# Altium PCB ntcsensor.PcbDoc
Units mil, origin at the board's own origin, x right, y up, seen from the top; angles counter-clockwise.
Board outline 944.88 x 1023.62 mil, 2 copper layers (Top Layer, Bottom Layer); 23 components, 17 nets, 85 pads, 58 vias.
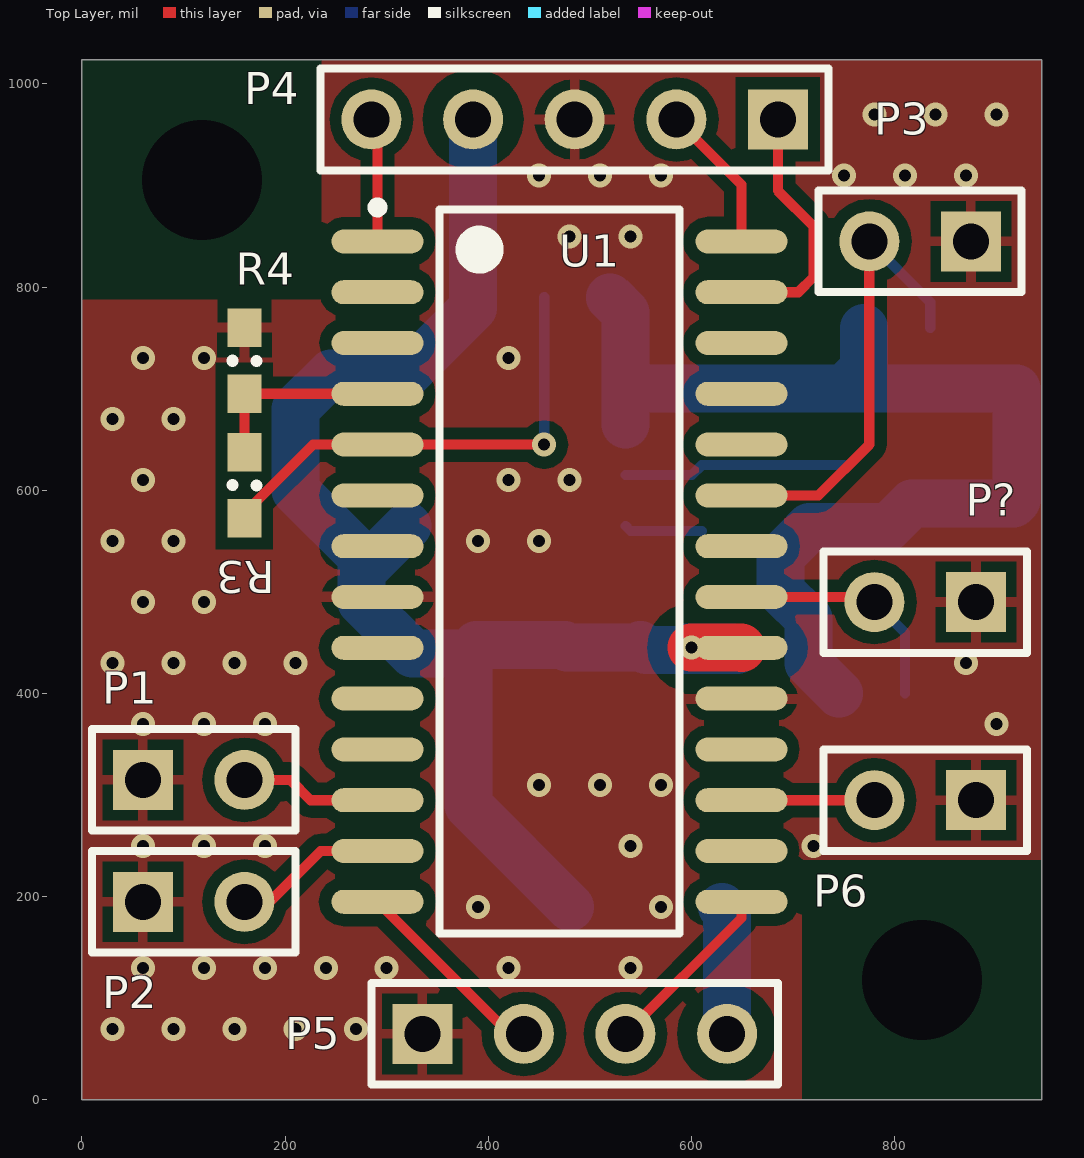
[diagram p0: Top Layer view]
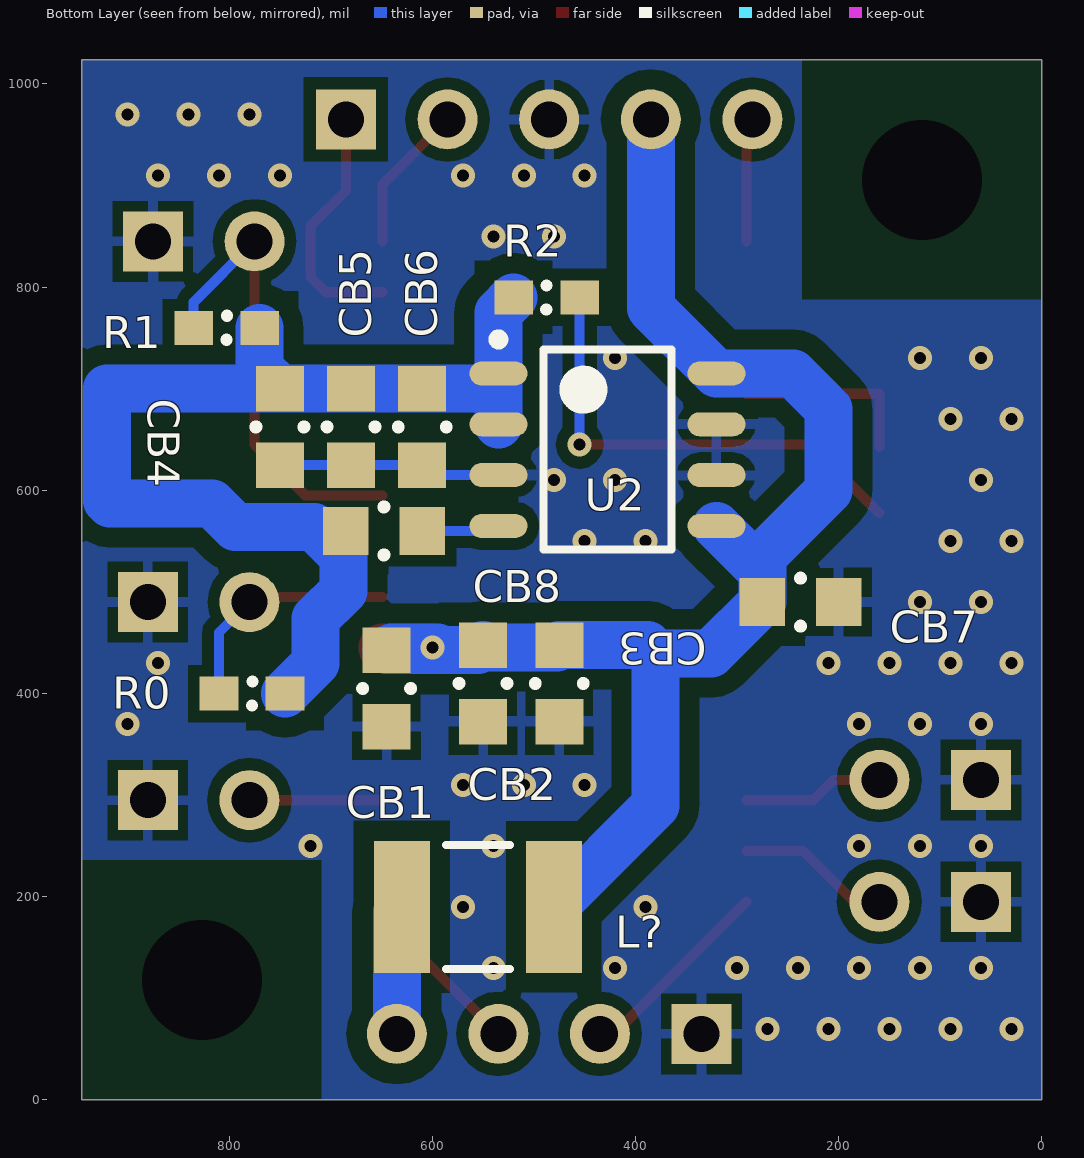
[diagram p1: Bottom Layer view, seen from below]

## Layer stack, top to bottom
Top Solder: solder mask 0.4, Solder Resist, Dk 3.5
Top Layer: signal copper 1.4
Dielectric 1: dielectric 12.6, FR-4, Dk 4.8
Bottom Layer: signal copper 1.4
Bottom Solder: solder mask 0.4, Solder Resist, Dk 3.5

## Board outline
0,0 0,1023.62 944.88,1023.62 944.88,0

## Design rules (kind name [scope] priority, off if disabled: settings)
Clearance Clearance_5 [HasFootprint('BALF-NRG') vs InPolygonClass('All Polygons')] p1: gap=19.68 ignorepadtopadclearanceinfootprint=FALSE
Clearance Clearance_6 [InNet('NetA1_ANT') vs InPolygonClass('All Polygons')] p2: gap=11.81 ignorepadtopadclearanceinfootprint=FALSE
Clearance Clearance_7 [InNetClass('HC') vs InPolygonClass('All Polygons')] p3: gap=19.68 ignorepadtopadclearanceinfootprint=FALSE
Clearance Clearance_9 [All vs InPolygonClass('All Polygons')] p4: gap=11.81 ignorepadtopadclearanceinfootprint=FALSE
Clearance Clearance_1 [InNet('NetA1_ANT')] p5: gap=3.94 ignorepadtopadclearanceinfootprint=FALSE
Clearance [InNetClass('RFB')] p6: gap=3.94 ignorepadtopadclearanceinfootprint=FALSE
Clearance Clearance_4 [HasFootprint('BALF-NRG')] p7: gap=7.87 ignorepadtopadclearanceinfootprint=FALSE
Clearance Clearance_3 [HasFootprint('MSOP-8')] p8: gap=7.87 ignorepadtopadclearanceinfootprint=FALSE
Clearance Clearance_2 [HasFootprint('BLUENRG-1')] p9: gap=5.91 ignorepadtopadclearanceinfootprint=FALSE
Clearance Clearance_8 [All] p10: gap=7.87 ignorepadtopadclearanceinfootprint=FALSE
HoleSize [All] p1: absolutevalues=TRUE maxlimit=1000 minlimit=1 maxpercent=80.000 minpercent=20.000
MaxMinImpedance [InNetClass('AN')] p1: minimum=45.00 maximum=55.00
MinimumSolderMaskSliver MinimumSolderMaskSliver_2 [HasFootprint('BALF-NRG')] p1: minsoldermaskwidth=0.79
MinimumSolderMaskSliver [HasFootprint('16MHZ_25_20')] p2: minsoldermaskwidth=4.72
MinimumSolderMaskSliver MinimumSolderMaskSliver_1 [All] p3: minsoldermaskwidth=7.87
PlaneClearance [All] p1: clearance=40
PolygonConnect PolygonConnect_1 [HasFootprint('BlueNRG-1')] p1: connectstyle=Direct reliefconductorwidth=10 reliefentries=4 polygonreliefangle="90 Angle" airgapwidth=10
PolygonConnect PolygonConnect_4 [HasFootprint('sma')] p2: connectstyle=Direct reliefconductorwidth=10 reliefentries=4 polygonreliefangle="90 Angle" airgapwidth=10
PolygonConnect PolygonConnect_3 [IsShieldingVia] p3: connectstyle=Direct reliefconductorwidth=10 reliefentries=4 polygonreliefangle="90 Angle" airgapwidth=10
PolygonConnect PolygonConnect_2 [IsStitchingVia] p4: connectstyle=Direct reliefconductorwidth=10 reliefentries=4 polygonreliefangle="90 Angle" airgapwidth=10
PolygonConnect [All] p5: connectstyle=Relief reliefconductorwidth=10 reliefentries=4 polygonreliefangle="90 Angle" airgapwidth=10
RoutingCorners [InNetClass('AN')] p1: cornerstyle=Round minsetback=100 maxsetback=100
RoutingCorners RoutingCorners_1 [All] p2: cornerstyle=45-Degree minsetback=100 maxsetback=100
RoutingVias [All] p1: holewidth=11.81 width=23.62 viastyle="Through Hole" minholewidth=11.81 minwidth=23.62 maxholewidth=11.81 maxwidth=23.62
SMDNeckDown [InNet('NetA1_ANT')] p1: percent=600.000
SignalStimulus [All] p1: kind=1 level=0 starttime=10.00n stoptime=60.00n periodtime=100.00n
SilkToSolderMaskClearance SilkToSolderMaskClearance_1 [HasFootprint('MY_0603')] p1: minsilkscreentomaskgap=2 clearancetoexposedcopper=TRUE
SilkToSolderMaskClearance SilkToSolderMaskClearance_2 [HasFootprint('MY_0805')] p2: minsilkscreentomaskgap=3.94 clearancetoexposedcopper=TRUE
SilkToSolderMaskClearance [IsPad] p3: minsilkscreentomaskgap=10 clearancetoexposedcopper=TRUE
SolderMaskExpansion [All] p1: expansion=4
SupplyNets SupplyNets_1 [InNet('VCC')] p1: voltage=3.000
SupplyNets [InNet('12V')] p2: voltage=12.00
Width [InNet('NetA1_ANT')] p1: maxlimit=67.17 minlimit=-1.73 preferedwidth=48.94 toplayer_minwidth=1.46 bottomlayer_maxwidth=-1.65 bottomlayer_prefwidth=-1.69 impedancedriven=TRUE minimp=40.000000 maximp=140.000000 favimp=50.000000
Width Width_2 [InNetClass('HC')] p2: maxlimit=47.24 minlimit=5.91 preferedwidth=47.24
Width Width_1 [All] p3: maxlimit=31.5 minlimit=5.91 preferedwidth=10
25 further rules are at their usual default settings.

## Classes and differential pairs
net class HC: 3V3 5V NetL?_1

## Components (designator, comment, footprint, x,y, rotation, side; value= is the part's Value field where it differs from the comment)
CB1 "10uF" MY_0805 645,405 r90 bottom value=100pF
CB2 "1nF" MY_0805 550,410 r90 bottom value=100pF
CB3 "100pF" MY_0805 475,410 r90 bottom
CB4 "10uF" MY_0805 750,662.4 r90 bottom value=100pF
CB5 "1nF" MY_0805 680,662.4 r90 bottom value=100pF
CB6 "100pF" MY_0805 610,662.4 r90 bottom
CB7 "1uF" MY_0805 237.6,490 r0 bottom value=100pF
CB8 "10nF" MY_0805 647.6,560 r0 bottom value=100pF
L? "Inductor" INDC4532 555.2,190 r180 bottom value=10uH
P1 "Header 2" HDR1X2 60,315 r0 top
P2 "Header 2" HDR1X2 60,195 r0 top
P3 "Header 2" HDR1X2 875,845 r180 top
P4 "Header 5" HDR1X5 685,965 r180 top
P5 "Header 4" HDR1X4 335,65 r0 top
P6 "Header 2" HDR1X2 880,295 r180 top
P? "Header 2" HDR1X2 880,490 r180 top
R0 "4.7k" MY_0603 777.52,400 r180 bottom value=1K
R1 "4.7k" MY_0603 802.48,760 r180 bottom value=1K
R2 "4.7k" MY_0603 487.52,790 r0 bottom value=1K
R3 "4.7k" MY_0603 160,605 r270 top value=1K
R4 "4.7k" MY_0603 160,727.52 r270 top value=1K
U1 "PIC16F1938-I/SN" SOIC-SO28_N 470,520 r0 top
U2 "LT17633" SOP8LDO 427.72,640 r180 bottom

## Footprints (in the part's own frame and the unit in brackets; to place one, negate y for a bottom-side part, rotate by r counter-clockwise, add the part's x,y. Pads: shape width x height; smd on the part's side, far side on the other; paste and mask are expansions set on the pad)
HDR1X2 [mm] "Connector; Header; 2 Position"
  rect 1.5x1.5 hole 0.9: 1(0,0)
  round 1.5 hole 0.9: 2(2.54,0)
  silkscreen extent -1.27,-1.27 3.81,1.27
HDR1X4 [mm] "Connector; Header; 4 Position"
  rect 1.5x1.5 hole 0.9: 1(0,0)
  round 1.5 hole 0.9: 2(2.54,0) 3(5.08,0) 4(7.62,0)
  silkscreen extent -1.27,-1.27 8.89,1.27
HDR1X5 [mm] "Connector; Header; 5 Position"
  rect 1.5x1.5 hole 0.9: 1(0,0)
  round 1.5 hole 0.9: 2(2.54,0) 3(5.08,0) 4(7.62,0) 5(10.16,0)
  silkscreen extent -1.27,-1.27 11.43,1.27
INDC4532 [mm] "Chip Inductor, Body 4.5x3.2mm, IPC High Density"
  rect 1.4x3.3 smd: 1(-1.9,0) 2(1.9,0)
  silkscreen extent -0.8,-1.55 0.8,1.55, body extent -2.4,-1.7 2.4,1.7, height 0.55
MY_0603 [mm] "0603 without silkscreen issues"
  rect 0.965x0.85 smd: 1(-0.825,0) 2(0.825,0)
  silkscreen extent 0,-0.3 0.01,0.31, body extent -0.8,-0.4 0.8,0.4, height 3
MY_0805 [mm] "0805 without silkscreen issues"
  rect 1.14x1.2 smd: 1(-0.955,0) 2(0.955,0)
  silkscreen extent -0.01,-0.61 0.01,0.61, body extent -1,-0.6 1,0.6, height 4
SOIC-SO28_N [mm] "SOIC, 28-Leads, Body 17.9x7.5mm, Pitch 1.27mm, IPC Medium Density"
  oval 2.3x0.6 smd: 1(-4.55,8.255) 2(-4.55,6.985) 3(-4.55,5.715) 4(-4.55,4.445) 5(-4.55,3.175) 6(-4.55,1.905) 7(-4.55,0.635) 8(-4.55,-0.635) 9(-4.55,-1.905) 10(-4.55,-3.175) 11(-4.55,-4.445) 12(-4.55,-5.715) 13(-4.55,-6.985) 14(-4.55,-8.255) 15(4.55,-8.255) 16(4.55,-6.985) 17(4.55,-5.715) 18(4.55,-4.445) 19(4.55,-3.175) 20(4.55,-1.905) 21(4.55,-0.635) 22(4.55,0.635) 23(4.55,1.905) 24(4.55,3.175) 25(4.55,4.445) 26(4.55,5.715) 27(4.55,6.985) 28(4.55,8.255)
  silkscreen extent -4.67,-9.05 3,9.23, body extent -3.8,-9.06 3.8,9.06, height 2.65
SOP8LDO [mm] "SOP, 8-Leads, Body 4.90x3.90mm, Pitch 1.27mm, IPC Medium Density"
  oval 1.45x0.6 smd: 1(-2.725,1.905) 2(-2.725,0.635) 3(-2.725,-0.635) 4(-2.725,-1.905) 5(2.725,-1.905) 6(2.725,-0.635) 7(2.725,0.635) 8(2.725,1.905)
  silkscreen extent -2.85,-2.5 1.6,2.88, body extent -2,-2.5 2,2.5, height 2.65

## Part data
CB1 CB2 CB3 CB4 CB5 CB6 CB7 CB8: library part "Cap Semi", "Capacitor (Semiconductor SIM Model)", LatestRevisionDate=29-May-2009, LatestRevisionNote="IPC-7351 Footprint Added.", PackageDescription="Chip Capacitor", PackageReference=C1206, Published=8-Jun-2000, Publisher="Altium Limited"
P1 P2 P3 P6 P?: "Header, 2-Pin", LatestRevisionDate=17-Jul-2002, LatestRevisionNote="Re-released for DXP Platform.", Publisher="Altium Limited"
P4: "Header, 5-Pin", LatestRevisionDate=17-Jul-2002, LatestRevisionNote="Re-released for DXP Platform.", Publisher="Altium Limited"
P5: "Header, 4-Pin", LatestRevisionDate=17-Jul-2002, LatestRevisionNote="Re-released for DXP Platform.", Publisher="Altium Limited"
R0 R1 R2 R3 R4: library part Res3, "Resistor", LatestRevisionDate=29-May-2009, LatestRevisionNote="IPC-7351 Footprint Added.", PackageDescription="Chip Resistor", PackageReference=J1-0603, Published=8-Jun-2000, Publisher="Altium Limited"
U1: library part PIC16F1936-I/SO, "CMOS Microcontroller with LCD Driver, 8K (words) Program Memory, 256 Bytes Data Memory, 512 Bytes SRAM, 25 I/O's, 28-Pin SOIC, Industrial Temperature", Supplier Part Number 1=PIC16F1936-I/SO-ND, Code_JEDEC=MS-013, ComponentLink1Description=Datasheet, ComponentLink1URL=http://ww1.microchip.com/downloads/en/DeviceDoc/41364C.pdf, ComponentLink2Description="Packaging Specification", ComponentLink2URL=http://www.microchip.com/stellent/groups/techpub_sg/documents/packagingspec/en012702.pdf, ComponentLink3Description="Microchip.com Home", ComponentLink3URL=http://www.microchip.com/, DatasheetVersion="revC, Sep-2009", LatestRevisionDate=11-Aug-2010, LatestRevisionNote="Sch. layout revised.", PackageDescription="28-Lead Plastic Small Outline (SO) - Wide 7.50mm Body [SOIC]", PackageReference=SOIC-SO28, PackageVersion="revBB, Aug-2009", Published=40149, Publisher="Altium Limited", Supplier 1=Digi-Key, Supplier 2=Farnell, Supplier Part Number 2=1755820
L?: Code_IEC=1005, Code_JEITA=0402, LatestRevisionDate=29-May-2009, LatestRevisionNote="IPC-7351 Footprint Added.", PackageDescription="Chip Inductor", PackageReference=0402-A, Published=8-Jun-2000, Publisher="Altium Limited"

## Free pads (board coordinates)
  round 60 hole 118.11: 1(118.11,905.51) 2(826.77,118.11)

## Via types
v1: diameter 23.62, hole 11.81, Top Layer to Bottom Layer, tented both sides, 58 vias

## Nets (pads, with @x,y where several pads share a name; then routed paths per layer and width w, separated by ;. In a path a pad name is that pad's centre, name@x,y a point inside that pad or via, vN(x,y) a via of type N, cw(c..) or ccw(c..) an arc to the next point about the centre after c; other vN are vias at no path point)
3V3: CB4.2 CB5.2 CB6.2 CB8.2 R0.2 R1.2 R2.2 U2.1 U2.2 | length 1114.7
  Bottom Layer w47.24: R2.2 535,775 U2.1 ; U2.2 U2.1 ; R0.2 715.02,430.02 715.02,473.68 687.6,501.1 687.6,535 703.62,551.02 716.3,563.7 793.7,563.7 817.02,587.02 917.02,587.02 920,590 920,700 CB4.2 ; R1.2 770,720 CB4.2 ; U2.1 550,700 CB6.2 CB5.2 CB4.2
5V: CB1.2 CB2.2 CB3.2 CB7.2 L?.2 P4.4 U1.20 U2.5 U2.8 | length 1467.4
  Top Layer w47.24: v1(600,445.2) 648.94,445.2 U1.20
  Bottom Layer w47.24: U2.5 275.2,519.76 ; P4.4 385,779.57 U2.8 245,715 210,680 210,600 275.2,534.8 275.2,519.76 ; L?.2 380.39,290 380.39,439.61 ; CB2.2 CB2.2@552.4,445.2 ; v1@595,445.2 v1(600,445.2) CB1.2@640,445.2 ; CB1.2 555,442.6 CB2.2@552.4,445.2 ; 275.2,519.76 CB7.2 325.59,439.61 380.39,439.61 ; 380.39,439.61 388.39,447.6 CB3.2 477.4,445.2 CB2.2@552.4,445.2
GND: CB1.1 CB2.1 CB3.1 CB4.1 CB5.1 CB6.1 CB7.1 P1.1 P2.1 P3.1 P4.3 P5.1 P6.1 P?.1 R4.1 U1.8 U1.19 U2.3 U2.6 U2.7 | length 219.1
  Bottom Layer w10: U2.3 600.2,615 CB6.1 CB5.1 CB4.1
  other v1: 30,70 90,70 150,70 210,70 270,70 60,130 120,130 180,130 240,130 300,130 420,130 540,130 390,190 570,190 60,250 120,250 180,250 540,250 720,250 450,310 510,310 570,310 60,370 120,370 180,370 900,370 30,430 90,430 150,430 210,430 870,430 60,490 120,490 30,550 90,550 390,550 450,550 60,610 420,610 480,610 30,670 90,670 60,730 120,730 420,730 480,850 540,850 450,910 510,910 570,910 750,910 810,910 870,910 780,970 840,970 900,970
ICSPC: P4.1 U1.27 | length 246.6
  Top Layer w10: U1.27 705,795 720,810 720,860 685,895 P4.1
ICSPD: P4.2 U1.28 | length 146.6
  Top Layer w10: P4.2 649.13,900.87 U1.28
IN1: P?.2 R0.1 U1.21 | length 235.4
  Top Layer w10: U1.21 775,495 P?.2
  Bottom Layer w10: P?.2 810,460 R0.1
IN2: P3.2 R1.1 U1.23 | length 456.4
  Top Layer w10: U1.23 725,595 775,645 P3.2
  Bottom Layer w10: P3.2 834.96,785.04 R1.1
MCLR: P4.5 U1.1 | length 122.4
  Top Layer w10: P4.5 290.87,959.13 U1.1
NetCB8_1: CB8.1 U2.4 | length 77.1
  Bottom Layer w10: U2.4 540,560 CB8.1
NetL?_1: L?.1 P5.4 | length 127.1
  Bottom Layer w47.24: L?.1 635,185 P5.4
NetP5_2: P5.2 U1.14 | length 198
  Top Layer w10: U1.14 420.87,65 P5.2
NetP5_3: P5.3 U1.15 | length 177.3
  Top Layer w10: P5.3 649.13,179.13 U1.15
NetP6_2: P6.2 U1.17 | length 130.9
  Top Layer w10: U1.17 P6.2
NetR2_1: R2.1 R3.2 U1.5 | length 468
  Top Layer w10: R3.2@160,577.52 227.48,645 U1.5 v1(455,645)
  Bottom Layer w10: v1(455,645) R2.1 R2.1
NetR3_1: R3.1 R4.2 U1.4 | length 183.4
  Top Layer w10: R3.1@160,642.48 R4.2 290.83,695.04 U1.4
OUT1: P2.2 U1.13 | length 151.6
  Top Layer w10: P2.2 185,195 235,245 U1.13
OUT2: P1.2 U1.12 | length 139.2
  Top Layer w10: P1.2 205,315 225,295 U1.12
pads on no net: U1.2 U1.3 U1.6 U1.7 U1.9 U1.10 U1.11 U1.16 U1.18 U1.22 U1.24 U1.25 U1.26

## Polygon pours and split planes (outlines as drawn)
GND on Bottom Layer "Top Layer-GND" (solid, remove dead copper, pour order 4): 0,1023.62 944.88,1023.62 944.88,0 0,0
GND on Top Layer "Top Layer-GND" (solid, remove dead copper, pour order 6): 0,1023.62 944.88,1023.62 944.88,0 0,0

## Other copper
Top Layer:
  pour cut-out: 0,1023.62 236.22,1023.62 236.22,787.4 0,787.4
  pour cut-out: 944.88,236.22 708.66,236.22 708.66,0 944.88,0
Bottom Layer:
  pour cut-out: 944.88,236.22 708.66,236.22 708.66,0 944.88,0
  pour cut-out: 0,1023.62 236.22,1023.62 236.22,787.4 0,787.4

## Silkscreen, mask and mechanical layers (free items; w line width, h text height)
Mechanical 1:
  the board outline again, w47.24